# EAGLE board astable_555 (EAGLE 6.5.0)
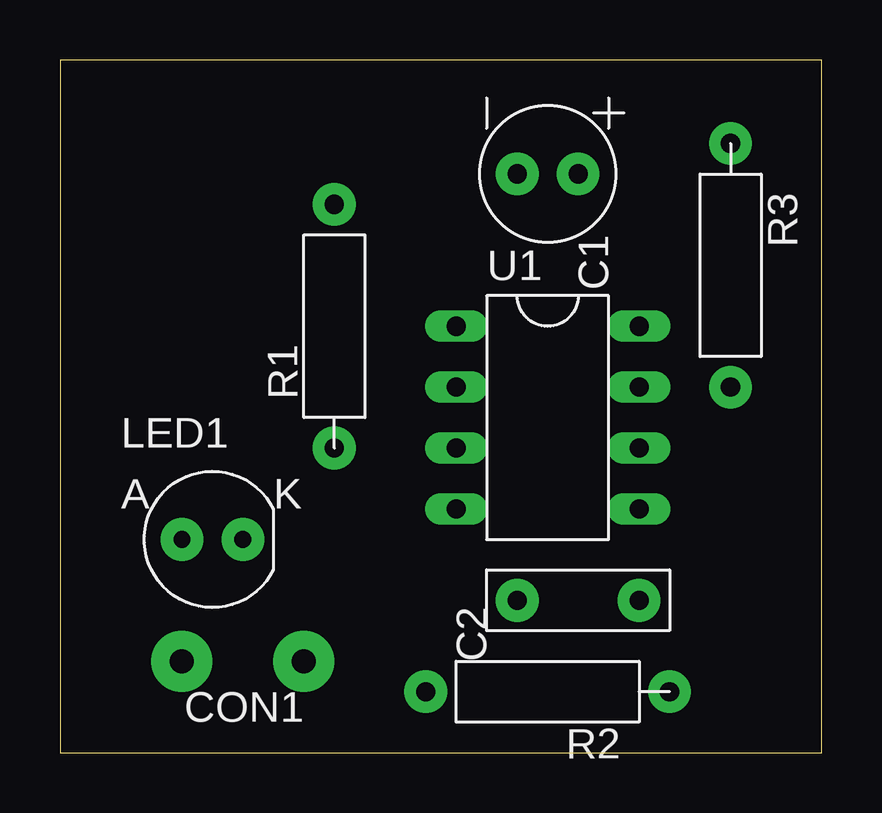
[diagram p0: board, top side]
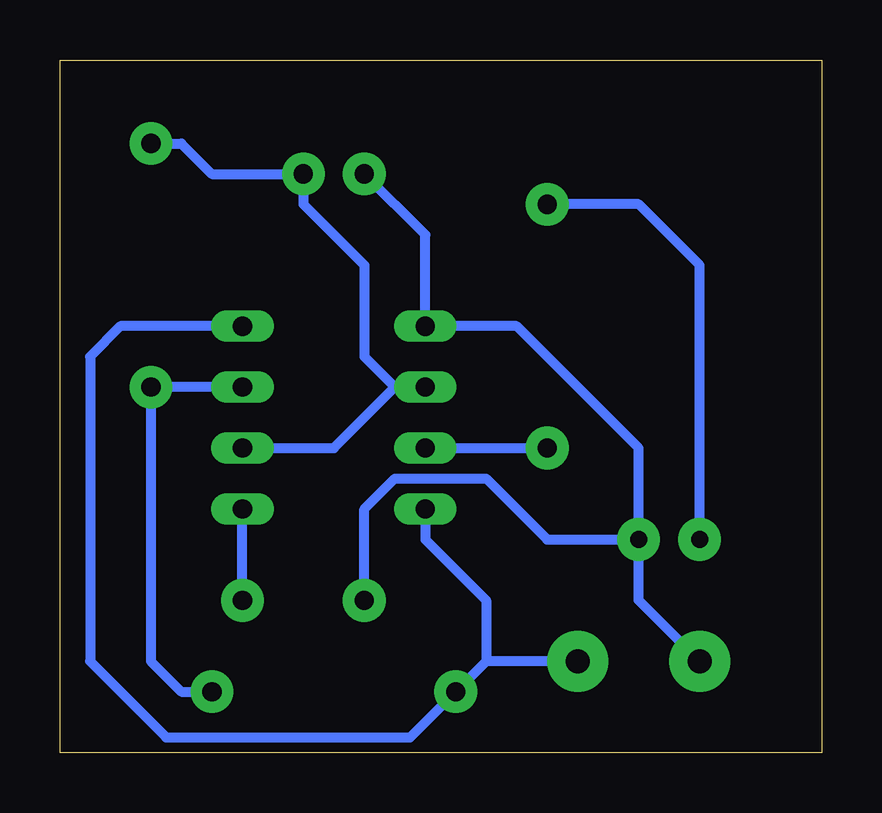
[diagram p1: board, bottom side, seen from below]

Size 31.73 x 28.88 mm. Coordinates in mm from the lower left corner, seen from the top.
Outline: 0,0 31.73,0 31.73,28.88 0,28.88 0,0
Copper layers (1*16): Top 0.035mm / dielectric 1.5mm / Bottom 0.035mm
Design rules "default": minimum track width 10mil, minimum drill 24mil, track to track 8mil, track to pad 8mil, pad to pad 8mil, via to via 8mil, smd to smd 8mil, copper to edge 40mil, drill to drill 8mil, minimum pad ring 10mil, minimum via ring 8mil, stop-mask expansion 4mil, vias tented up to drill 0mil, thermal gap 10mil

## Footprints (pad centres in the part's own frame; a part is rotated, then mirrored left to right if it is on the bottom)
POLRADIAL01/2 = drill 0.8 pad 1.778: NEGATIVE 0,0; POSITIVE 0,2.54
CAP02 = drill 0.8 pad 1.778: P$1 0,0; P$2 0,5.08
PCB-STAKES-1X2 = drill 1 pad 2.54: 1 0,0; 2 0,5.08
LED-VERT-5MM = drill 0.7 pad 1.778: ANODE 0,0; CATHODE 2.54,0
AXIAL04 = drill 0.8 pad 1.778: 1 -5.08,0; 2 5.08,0
DIL8 = drill 0.8 long: 1 0,0; 2 2.54,0; 3 5.08,0; 4 7.62,0; 5 7.62,7.62; 6 5.08,7.62; 7 2.54,7.62; 8 0,7.62

## Placement (x,y rotation side)
C1  1uF  [POLRADIAL01/2]  19.05,24.13 270 top
C2  10nF  [CAP02]  24.13,6.35 90 top
CON1  [PCB-STAKES-1X2]  10.16,3.81 90 top
LED1  [LED-VERT-5MM]  5.08,8.89 0 top
R1  1k  [AXIAL04]  11.43,17.78 90 top
R2  1k  [AXIAL04]  20.32,2.54 180 top
R3  470k  [AXIAL04]  27.94,20.32 270 top
U1  NE555P  [DIL8]  16.51,17.78 270 top

## Library data of the parts
C1 C2 CON1 LED1 R1-R3 U1 = steves

## Nets
GND: C1.NEGATIVE C2.P$2 CON1.2 LED1.CATHODE U1.1
N$2: R1.1 U1.3
N$3: LED1.ANODE R1.2
N$5: C2.P$1 U1.5
N$6: C1.POSITIVE R3.1 U1.2 U1.6
N$7: R2.1 R3.2 U1.7
VCC: CON1.1 R2.2 U1.4 U1.8

## Tracks (layer width: path | path; a pad name or v marks a point on that pad's centre or on a via)
GND
  Bottom 0.406: CON1.2 7.62,6.35 LED1.CATHODE | LED1.CATHODE 7.62,12.7 12.7,17.78 U1.1 16.51,21.59 C1.NEGATIVE | C2.P$2 19.05,10.16 17.78,11.43 13.97,11.43 11.43,8.89 LED1.CATHODE
N$2
  Bottom 0.406: U1.3 R1.1
N$3
  Bottom 0.406: LED1.ANODE 5.08,20.32 7.62,22.86 R1.2
N$5
  Bottom 0.406: C2.P$1 U1.5
N$6
  Bottom 0.406: R3.1 26.67,25.4 25.4,24.13 C1.POSITIVE 21.59,22.86 19.05,20.32 19.05,16.51 17.78,15.24 | 17.78,15.24 U1.2 | U1.6 20.32,12.7 17.78,15.24
N$7
  Bottom 0.406: U1.7 R3.2 27.94,3.81 26.67,2.54 R2.1
VCC
  Bottom 0.406: CON1.1 13.97,3.81 | 13.97,3.81 R2.2 17.14,0.64 27.3,0.64 30.48,3.81 30.48,16.51 29.21,17.78 U1.8 | U1.4 16.51,8.89 13.97,6.35 13.97,3.81